# EAGLE board jam1 (EAGLE 9.6.2)
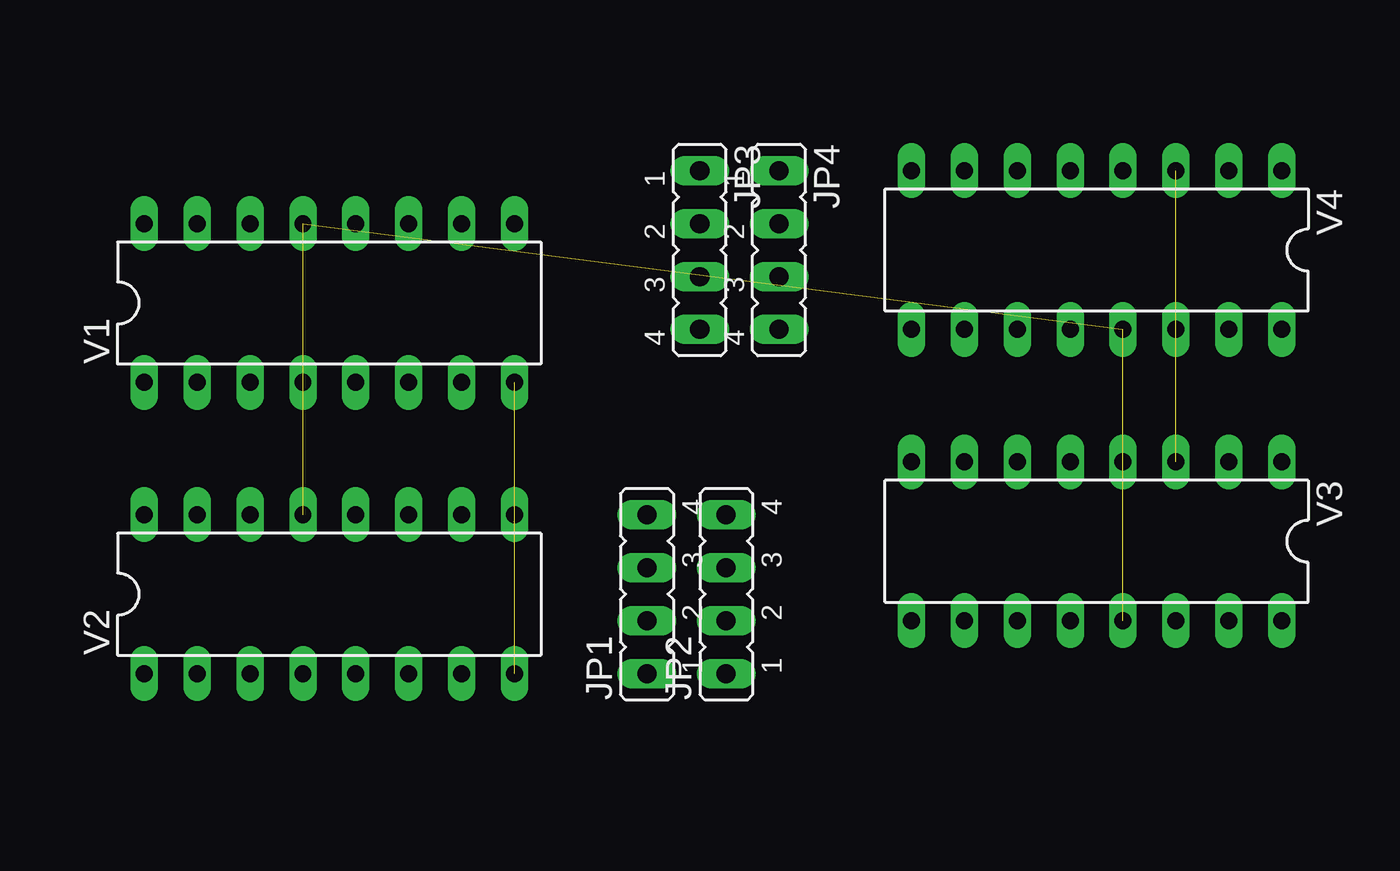
[diagram p0: board, top side]
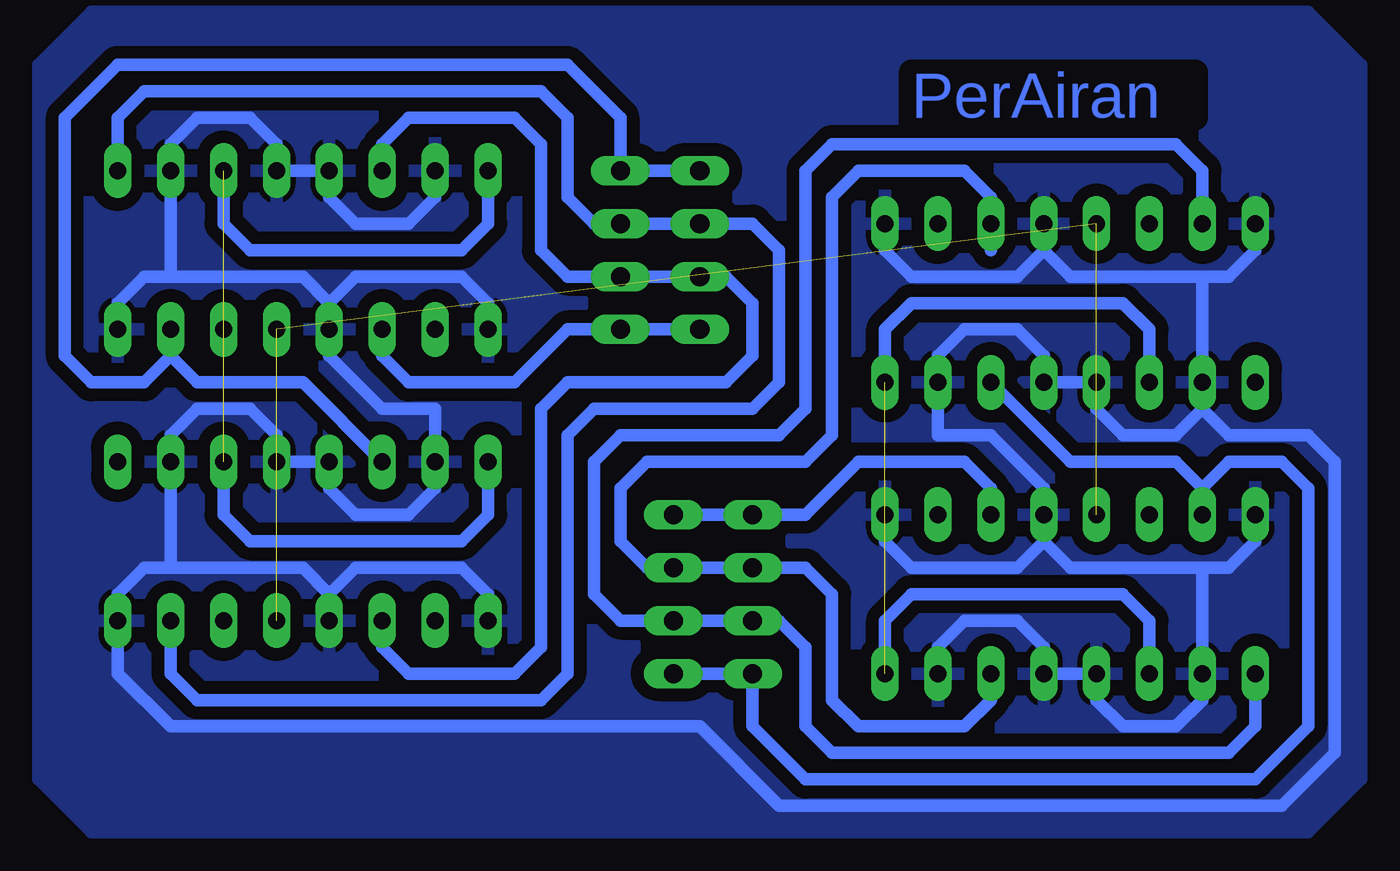
[diagram p1: board, bottom side, seen from below]

No outline drawn. Coordinates in mm, seen from the top.
Copper layers (1*16): Top 0.035mm / dielectric 1.5mm / Bottom 0.035mm
Design rules "default": minimum track width 6mil, minimum drill 0.35mm, track to track 6mil, track to pad 6mil, pad to pad 6mil, via to via 6mil, smd to smd 6mil, copper to edge 40mil, drill to drill 6mil, minimum pad ring 10mil, minimum via ring 8mil, stop-mask expansion 4mil, vias tented up to drill 0mil, thermal gap 10mil

## Footprints (pad centres in the part's own frame; a part is rotated, then mirrored left to right if it is on the bottom)
JP4 = drill 0.914 long: 1 -3.81,0; 2 -1.27,0; 3 1.27,0; 4 3.81,0
DIL16 = drill 0.813 long: 1 -8.89,-3.81; 2 -6.35,-3.81; 3 -3.81,-3.81; 4 -1.27,-3.81; 5 1.27,-3.81; 6 3.81,-3.81; 7 6.35,-3.81; 8 8.89,-3.81; 9 8.89,3.81; 10 6.35,3.81; 11 3.81,3.81; 12 1.27,3.81; 13 -1.27,3.81; 14 -3.81,3.81; 15 -6.35,3.81; 16 -8.89,3.81

## Placement (x,y rotation side)
JP1  [JP4]  35.56,46.99 90 top
JP2  [JP4]  39.37,46.99 90 top
JP3  [JP4]  38.1,63.5 270 top
JP4  [JP4]  41.91,63.5 270 top
V1  7476N  [DIL16]  20.32,60.96 0 top
V2  7476N  [DIL16]  20.32,46.99 0 top
V3  7476N  [DIL16]  57.15,49.53 180 top
V4  7476N  [DIL16]  57.15,63.5 180 top

## Library data of the parts
JP1-JP4 = jumper
V1-V4 = 74ttl-din

## Nets
+UB: V1.2 V1.4 V1.5 V1.7 V1.9 V1.12 V1.16 V2.2 V2.4 V2.5 V2.7 V2.9 V2.12 V2.16 V3.2 V3.4 V3.5 V3.7 V3.9 V3.12 V3.16 V4.2 V4.4 V4.5 V4.7 V4.9 V4.12 V4.16
-UB: V1.13 V2.13 V3.13 V4.13
N$1: JP1.4 JP2.4 V2.11
N$2: JP1.3 JP2.3 V1.11 V2.6
N$3: JP1.1 JP2.1 V1.6 V2.15
N$4: V3.3 V3.8 V4.3 V4.8
N$5: JP3.3 JP4.3 V3.11 V4.6
N$6: JP1.2 JP2.2 V1.15 V2.1
N$7: JP3.1 JP4.1 V3.6 V4.15
N$8: V1.3 V1.8 V2.3 V2.8
N$9: JP3.4 JP4.4 V4.11
N$10: JP3.2 JP4.2 V3.15 V4.1

## Tracks (layer width: path | path; a pad name or v marks a point on that pad's centre or on a via)
+UB
  Bottom 0.61: V2.7 26.67,44.45 25.4,45.72 22.86,45.72 21.59,44.45 V2.5 V2.4 19.05,41.91 17.78,40.64 15.24,40.64 13.97,41.91 V2.2 | 21.59,49.53 22.86,48.26 27.94,48.26 29.21,49.53 V2.9 | 13.97,44.45 V2.2 | 21.59,49.53 V2.12 21.59,52.07 24.13,54.61 26.67,54.61 V1.7 26.67,58.42 25.4,59.69 22.86,59.69 21.59,58.42 V1.5 V1.4 19.05,55.88 17.78,54.61 15.24,54.61 13.97,55.88 | 21.59,49.53 20.32,48.26 13.97,48.26 | 13.97,48.26 12.7,48.26 11.43,49.53 V2.16 | V2.2 13.97,48.26 | 21.59,63.5 20.32,62.23 13.97,62.23 | 13.97,62.23 12.7,62.23 11.43,63.5 V1.16 | 13.97,62.23 V1.2 13.97,55.88 | V1.9 29.21,63.5 27.94,62.23 22.86,62.23 21.59,63.5 | 21.59,63.5 V1.12 | V4.16 66.04,60.96 64.77,62.23 63.5,62.23 | 63.5,62.23 57.15,62.23 55.88,60.96 | 55.88,60.96 V4.12 55.88,58.42 53.34,55.88 50.8,55.88 V3.7 50.8,52.07 52.07,50.8 54.61,50.8 55.88,52.07 V3.5 V3.4 58.42,54.61 59.69,55.88 62.23,55.88 63.5,54.61 V3.2 63.5,48.26 | 63.5,62.23 V4.2 63.5,68.58 62.23,69.85 59.69,69.85 58.42,68.58 V4.4 V4.5 55.88,66.04 54.61,64.77 52.07,64.77 50.8,66.04 V4.7 | V4.9 48.26,60.96 49.53,62.23 54.61,62.23 55.88,60.96 | 63.5,48.26 64.77,48.26 66.04,46.99 V3.16 66.04,43.18 63.5,40.64 38.1,40.64 34.29,36.83 10.16,36.83 7.62,39.37 7.62,53.34 8.89,54.61 12.7,54.61 13.97,55.88 | 63.5,48.26 57.15,48.26 55.88,46.99 | V3.9 48.26,46.99 49.53,48.26 54.61,48.26 55.88,46.99 | 55.88,46.99 V3.12
  pour Bottom (isolate 0.61): 13.97,74.93 67.31,74.93 69.85,72.39 69.85,38.1 67.31,35.56 8.89,35.56 6.35,38.1 6.35,72.39 8.89,74.93
-UB  (3 unrouted)
N$1
  Bottom 0.61: V2.11 24.13,52.07 25.4,53.34 30.48,53.34 33.02,50.8 JP1.4 JP2.4
N$2
  Bottom 0.61: V2.6 24.13,41.91 25.4,40.64 30.48,40.64 31.75,41.91 31.75,46.99 33.02,48.26 JP1.3 | 24.13,63.5 V1.11 24.13,66.04 25.4,67.31 30.48,67.31 31.75,66.04 31.75,54.61 33.02,53.34 40.64,53.34 41.91,52.07 41.91,49.53 40.64,48.26 JP2.3 JP1.3 | 36.83,48.26 JP1.3
N$3
  Bottom 0.61: V2.15 13.97,52.07 | 13.97,52.07 12.7,53.34 10.16,53.34 8.89,52.07 8.89,40.64 11.43,38.1 33.02,38.1 35.56,40.64 JP1.1 JP2.1 | 13.97,52.07 15.24,53.34 20.32,53.34 V1.6
N$4  (1 unrouted)
  Bottom 0.61: V4.3 60.96,64.77 59.69,63.5 49.53,63.5 48.26,64.77 V4.8 | V3.3 60.96,50.8 59.69,49.53 49.53,49.53 48.26,50.8 V3.8
N$5
  Bottom 0.61: V4.6 53.34,68.58 52.07,69.85 46.99,69.85 45.72,68.58 45.72,63.5 44.45,62.23 JP4.3 JP3.3 36.83,62.23 35.56,60.96 35.56,58.42 36.83,57.15 44.45,57.15 45.72,55.88 45.72,44.45 46.99,43.18 52.07,43.18 53.34,44.45 V3.11
N$6
  Bottom 0.61: V2.1 11.43,40.64 12.7,39.37 31.75,39.37 33.02,40.64 33.02,44.45 34.29,45.72 JP1.2 JP2.2 41.91,45.72 43.18,46.99 43.18,53.34 41.91,54.61 34.29,54.61 33.02,55.88 33.02,67.31 31.75,68.58 15.24,68.58 13.97,67.31 V1.15 13.97,66.04
N$7
  Bottom 0.61: 63.5,58.42 64.77,57.15 67.31,57.15 68.58,58.42 68.58,69.85 66.04,72.39 44.45,72.39 41.91,69.85 JP4.1 JP3.1 | V4.15 63.5,58.42 | 63.5,58.42 62.23,57.15 57.15,57.15 V3.6
N$8  (1 unrouted)
  Bottom 0.61: V2.3 16.51,45.72 17.78,46.99 27.94,46.99 29.21,45.72 V2.8 | 16.51,58.42 V1.3 16.51,59.69 17.78,60.96 27.94,60.96 29.21,59.69 V1.8
N$9
  Bottom 0.61: V4.11 53.34,58.42 52.07,57.15 46.99,57.15 44.45,59.69 JP4.4 JP3.4
N$10
  Bottom 0.61: V4.1 66.04,69.85 64.77,71.12 45.72,71.12 44.45,69.85 44.45,66.04 43.18,64.77 JP4.2 JP3.2 35.56,64.77 34.29,63.5 34.29,57.15 35.56,55.88 43.18,55.88 44.45,54.61 44.45,43.18 45.72,41.91 62.23,41.91 63.5,43.18 V3.15

## Text on the board
Bottom: PerAiran